# EAGLE board Line sensors gerber (EAGLE 9.4.1)
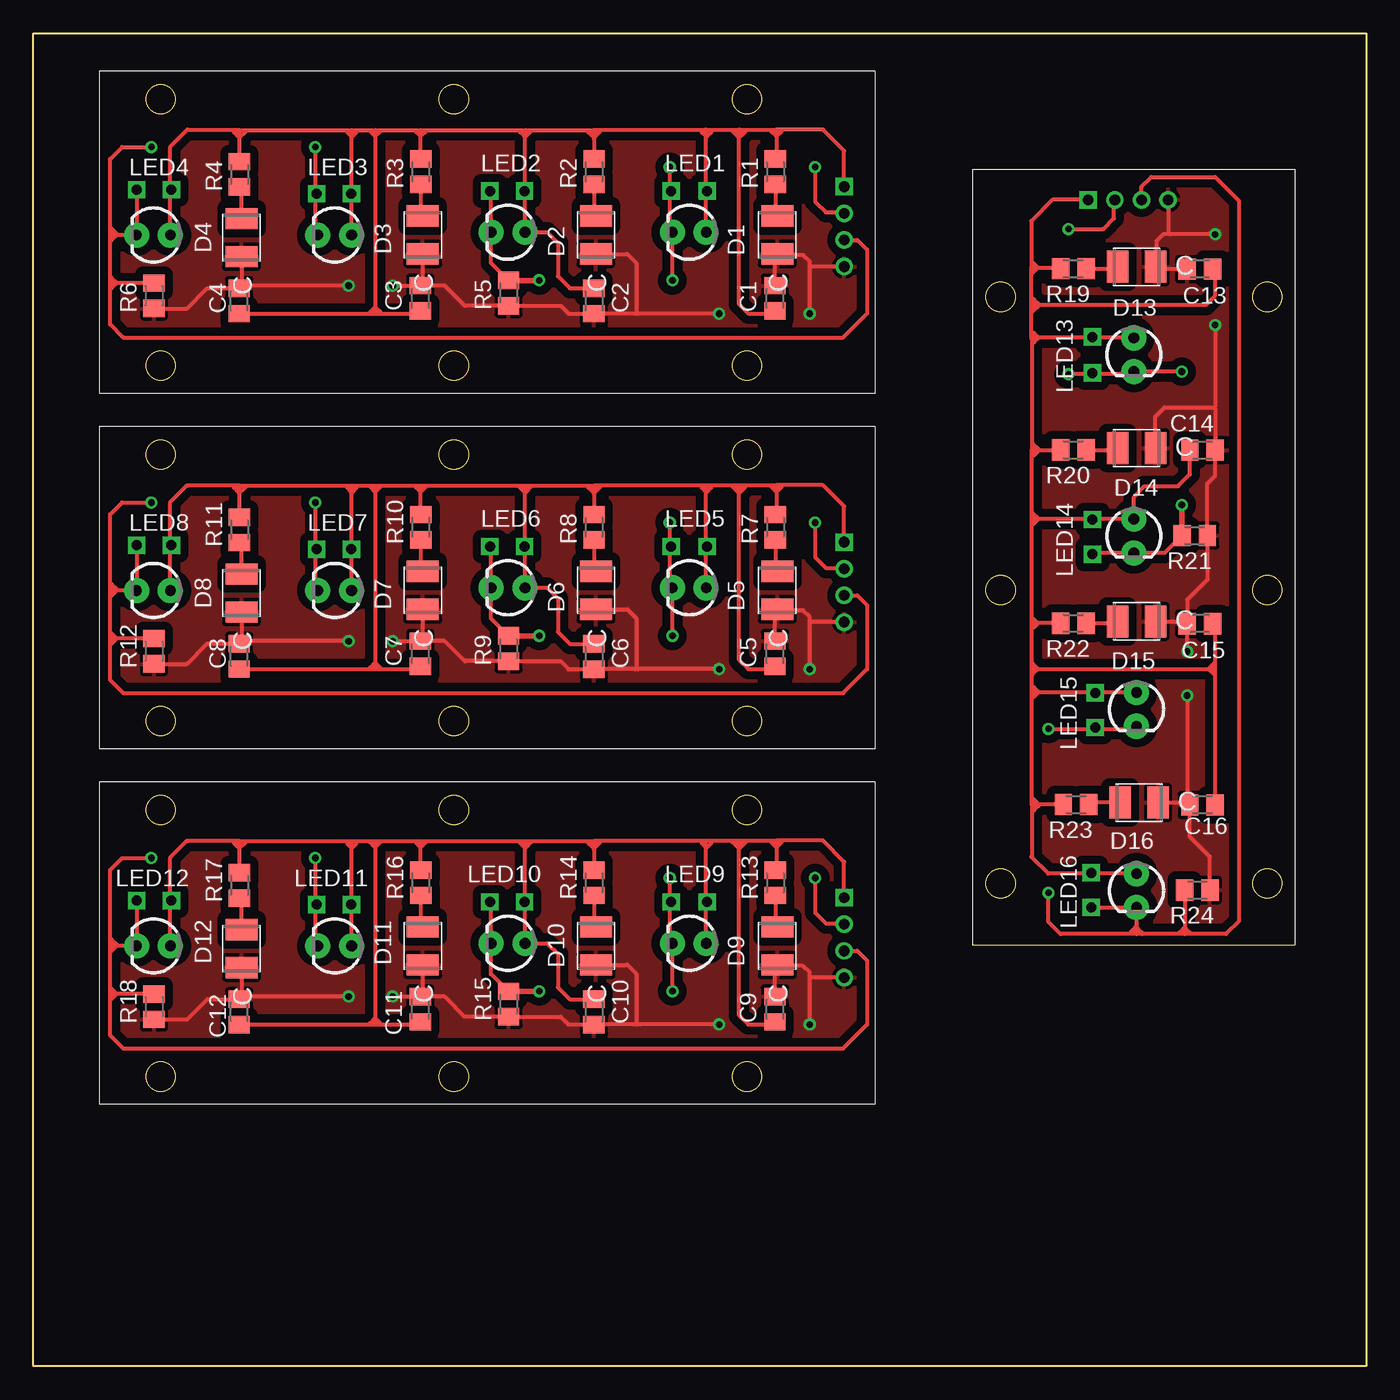
[diagram p0: board, top side]
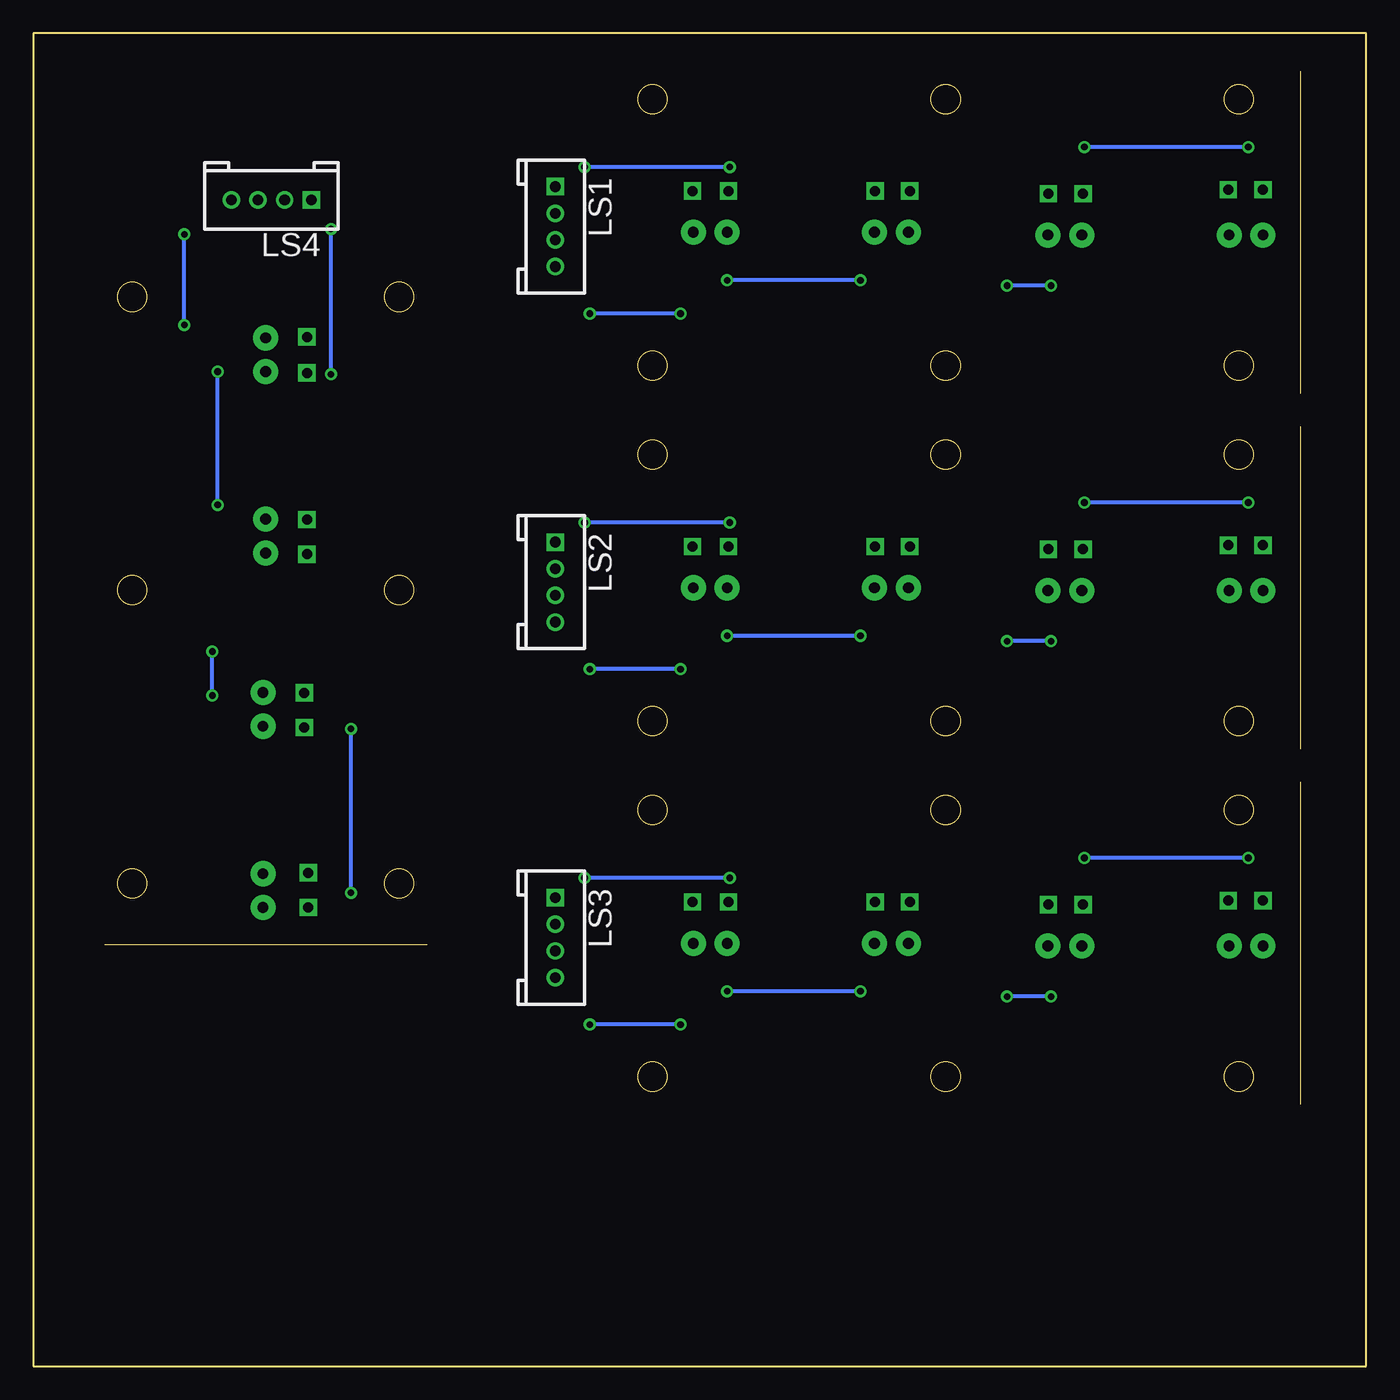
[diagram p1: board, bottom side, seen from below]

Size 100 x 100 mm. Coordinates in mm from the lower left corner, seen from the top.
Outline: 4.95,97.17 4.95,72.98
Outline: 4.95,70.5 4.95,46.31
Outline: 4.95,43.83 4.95,19.64
Outline: 70.47,31.62 94.66,31.62
Outline: 0,0 0,100 100,100 100,0 0,0
Outline: circle at 9.55,75.07 radius 1.1
Outline: circle at 53.55,95.07 radius 1.1
Outline: circle at 31.55,95.07 radius 1.1
Outline: circle at 9.55,95.07 radius 1.1
Outline: circle at 53.55,75.07 radius 1.1
Outline: circle at 31.55,75.07 radius 1.1
Outline: circle at 9.55,75.07 radius 1.1
Outline: circle at 9.55,95.07 radius 1.1
Outline: circle at 9.55,75.07 radius 1.1
Outline: circle at 53.55,95.07 radius 1.1
Outline: circle at 31.55,95.07 radius 1.1
Outline: circle at 9.55,95.07 radius 1.1
Outline: circle at 53.55,75.07 radius 1.1
Outline: circle at 31.55,75.07 radius 1.1
Outline: circle at 9.55,48.4 radius 1.1
Outline: circle at 53.55,68.4 radius 1.1
Outline: circle at 31.55,68.4 radius 1.1
Outline: circle at 9.55,68.4 radius 1.1
Outline: circle at 53.55,48.4 radius 1.1
Outline: circle at 31.55,48.4 radius 1.1
Copper layers (1*16): Top 0.035mm / dielectric 1.5mm / Bottom 0.035mm
Design rules "default": minimum track width 6mil, minimum drill 0.35mm, track to track 6mil, track to pad 6mil, pad to pad 6mil, via to via 6mil, smd to smd 6mil, copper to edge 40mil, drill to drill 6mil, minimum pad ring 10mil, minimum via ring 8mil, stop-mask expansion 4mil, vias tented up to drill 0mil, thermal gap 10mil

## Footprints (pad centres in the part's own frame; a part is rotated, then mirrored left to right if it is on the bottom)
M0805 = smd 1.3 x 1.6: 1 -0.95,0; 2 0.95,0
3528-2PIN = smd 1.6 x 2.4: 1 -1.425,0; 2 1.425,0
LED3MM = drill 0.813 pad 1.88: A -1.27,0; K 1.27,0
4P-2.0 = drill 0.8 pad 1.27 square: 1 -3,0 | drill 0.8 pad 1.27: 2 -1,0; 3 1,0; 4 3,0

## Placement (x,y rotation side)
C1  100n  [M0805]  55.64,80.12 270 top
C2  100n  [M0805]  42.06,79.92 90 top
C3  100n  [M0805]  29.04,80.12 270 top
C4  100n  [M0805]  15.44,79.92 270 top
C5  100n  [M0805]  55.64,53.45 270 top
C6  100n  [M0805]  42.06,53.25 90 top
C7  100n  [M0805]  29.04,53.45 270 top
C8  100n  [M0805]  15.44,53.25 270 top
C9  100n  [M0805]  55.64,26.78 270 top
C10  100n  [M0805]  42.06,26.58 90 top
C11  100n  [M0805]  29.04,26.78 270 top
C12  100n  [M0805]  15.44,26.58 270 top
C13  100n  [M0805]  87.52,82.31 0 top
C14  100n  [M0805]  87.72,68.73 180 top
C15  100n  [M0805]  87.52,55.71 0 top
C16  100n  [M0805]  87.72,42.11 0 top
D1  [3528-2PIN]  55.82,84.87 90 top
D2  [3528-2PIN]  42.22,84.87 90 top
D3  [3528-2PIN]  29.22,84.87 90 top
D4  [3528-2PIN]  15.62,84.67 90 top
D5  [3528-2PIN]  55.82,58.2 90 top
D6  [3528-2PIN]  42.22,58.2 90 top
D7  [3528-2PIN]  29.22,58.2 90 top
D8  [3528-2PIN]  15.62,58 90 top
D9  [3528-2PIN]  55.82,31.53 90 top
D10  [3528-2PIN]  42.22,31.53 90 top
D11  [3528-2PIN]  29.22,31.53 90 top
D12  [3528-2PIN]  15.62,31.33 90 top
D13  [3528-2PIN]  82.77,82.49 180 top
D14  [3528-2PIN]  82.77,68.89 180 top
D15  [3528-2PIN]  82.77,55.89 180 top
D16  [3528-2PIN]  82.97,42.29 180 top
LED1  [LED3MM]  49.21,85.07 180 top
LED2  [LED3MM]  35.61,85.07 180 top
LED3  [LED3MM]  22.61,84.87 180 top
LED4  [LED3MM]  9.01,84.87 180 top
LED5  [LED3MM]  49.21,58.4 180 top
LED6  [LED3MM]  35.61,58.4 180 top
LED7  [LED3MM]  22.61,58.2 180 top
LED8  [LED3MM]  9.01,58.2 180 top
LED9  [LED3MM]  49.21,31.73 180 top
LED10  [LED3MM]  35.61,31.73 180 top
LED11  [LED3MM]  22.61,31.53 180 top
LED12  [LED3MM]  9.01,31.53 180 top
LED13  [LED3MM]  82.57,75.88 270 top
LED14  [LED3MM]  82.57,62.28 270 top
LED15  [LED3MM]  82.77,49.28 270 top
LED16  [LED3MM]  82.77,35.68 270 top
LS1  [4P-2.0]  60.83,85.5 270 bottom
LS2  [4P-2.0]  60.83,58.83 270 bottom
LS3  [4P-2.0]  60.83,32.16 270 bottom
LS4  [4P-2.0]  82.14,87.5 180 bottom
R1  330  [M0805]  55.67,89.61 90 top
R2  330  [M0805]  42.07,89.61 90 top
R3  330  [M0805]  29.07,89.61 90 top
R4  330  [M0805]  15.47,89.41 90 top
R5  10k  [M0805]  35.65,80.51 90 top
R6  10k  [M0805]  9.05,80.31 90 top
R7  330  [M0805]  55.67,62.94 90 top
R8  330  [M0805]  42.07,62.94 90 top
R9  10k  [M0805]  35.65,53.84 90 top
R10  330  [M0805]  29.07,62.94 90 top
R11  330  [M0805]  15.47,62.74 90 top
R12  10k  [M0805]  9.05,53.64 90 top
R13  330  [M0805]  55.67,36.27 90 top
R14  330  [M0805]  42.07,36.27 90 top
R15  10k  [M0805]  35.65,27.17 90 top
R16  330  [M0805]  29.07,36.27 90 top
R17  330  [M0805]  15.47,36.07 90 top
R18  10k  [M0805]  9.05,26.97 90 top
R19  330  [M0805]  78.03,82.34 180 top
R20  330  [M0805]  78.03,68.74 180 top
R21  10k  [M0805]  87.13,62.32 180 top
R22  330  [M0805]  78.03,55.74 180 top
R23  330  [M0805]  78.23,42.14 180 top
R24  10k  [M0805]  87.33,35.72 180 top

## Library data of the parts
C1-C16 R1-R24 = resistor
D1-D16 = Wurth_Elektronik_Optoelectronics_rev15b; COMPANY-URL: http://www.we-online.de; CREATED-BY: Christin Otto; CREATED-DATE: APR 2013; DATASHEET-URL: http://katalog.we-online.de/en/led/WL-SMTW?m=t&sq=smtw&sp=&sp=http%3A%2F%2Fwww.we-online.de%2Fweb%2Fen%2Felectronic_components%2Fsearchpage_PBS.php%3Fsearch%3Dsmtw; MANUFACTURER: Würth Elektronik eiSos GmbH
LED1-LED16 = SparkFun
LS1-LS4 = Connector

## Nets
5V: C1.2 C2.2 C3.2 C4.2 LED1.A LED2.A LED3.A LED4.A LS1.1 R1.2 R2.2 R3.2 R4.2
5V1: C5.2 C6.2 C7.2 C8.2 LED5.A LED6.A LED7.A LED8.A LS2.1 R7.2 R8.2 R10.2 R11.2
5V2: C9.2 C10.2 C11.2 C12.2 LED9.A LED10.A LED11.A LED12.A LS3.1 R13.2 R14.2 R16.2 R17.2
5V3: C13.2 C14.2 C15.2 C16.2 LED13.A LED14.A LED15.A LED16.A LS4.1 R19.2 R20.2 R22.2 R23.2
GND: C1.1 C2.1 C3.1 C4.1 D1.1 D2.1 D3.1 D4.1 LS1.4 R5.1 R6.1
GND4: C5.1 C6.1 C7.1 C8.1 D5.1 D6.1 D7.1 D8.1 LS2.4 R9.1 R12.1
GND5: C9.1 C10.1 C11.1 C12.1 D9.1 D10.1 D11.1 D12.1 LS3.4 R15.1 R18.1
GND6: C13.1 C14.1 C15.1 C16.1 D13.1 D14.1 D15.1 D16.1 LS4.4 R21.1 R24.1
N$1: D5.2 R7.1
N$3: D1.2 R1.1
N$4: D2.2 R2.1
N$6: D6.2 R8.1
N$7: D7.2 R10.1
N$8: D8.2 R11.1
N$13: D3.2 R3.1
N$16: D4.2 R4.1
N$53: D9.2 R13.1
N$54: D10.2 R14.1
N$55: D11.2 R16.1
N$56: D12.2 R17.1
N$79: D13.2 R19.1
N$80: D14.2 R20.1
N$81: D15.2 R22.1
N$82: D16.2 R23.1
SIG1: LED1.K LED2.K LS1.2 R5.2
SIG2: LED3.K LED4.K LS1.3 R6.2
SIG3: LED5.K LED6.K LS2.2 R9.2
SIG4: LED7.K LED8.K LS2.3 R12.2
SIG5: LED9.K LED10.K LS3.2 R15.2
SIG6: LED11.K LED12.K LS3.3 R18.2
SIG7: LED13.K LED14.K LS4.2 R21.2
SIG8: LED15.K LED16.K LS4.3 R24.2

## Tracks (layer width: path | path; a pad name or v marks a point on that pad's centre or on a via)
5V
  Top 0.305: LS1.1 60.83,91.19 59.25,92.77 55.75,92.77 | 55.75,92.77 55.75,92.27 | 55.75,92.27 55.75,90.65 R1.2 | LED1.A 50.48,92.74 | 50.48,92.74 50.45,92.77 52.95,92.77 | 52.95,92.77 55.75,92.77 | 50.48,92.74 42.07,92.74 | 42.07,92.74 R2.2 | R3.2 29.07,92.74 | 29.07,92.74 36.95,92.74 | 36.95,92.74 42.07,92.74 | LED3.A 23.88,92.74 | 23.88,92.74 25.65,92.74 | 25.65,92.74 29.07,92.74 | R4.2 15.47,92.74 | 15.47,92.74 23.88,92.74 | 36.95,92.74 36.88,92.67 LED2.A 38.55,85.07 39.35,84.27 39.35,81.77 40.25,80.87 C2.2 | 52.95,92.17 52.95,79.67 53.65,78.97 55.44,78.97 C1.2 | 52.95,92.17 52.95,92.27 | 52.95,92.27 52.95,92.77 | C4.2 25.65,78.97 | 25.65,78.97 28.84,78.97 C3.2 | 25.65,92.74 25.65,92.27 | 25.65,92.27 25.65,79.47 | 25.65,79.47 25.65,78.97 | LED4.A 10.28,91.5 11.55,92.77 11.58,92.74 15.47,92.74 | 25.65,92.27 26.05,92.67 | 25.65,92.27 25.25,92.67 | 25.65,79.47 26.05,79.07 | 25.65,79.47 25.25,79.07 | 52.95,92.27 53.05,92.27 53.35,92.57 | 52.95,92.17 52.45,92.67 52.65,92.67 52.75,92.57 | 55.75,92.27 56.15,92.67 | 55.75,92.27 55.35,92.67
  Top 0.406: C2.2
5V1
  Top 0.305: LS2.1 60.83,64.52 59.25,66.1 55.75,66.1 | 55.75,66.1 55.75,65.6 | 55.75,65.6 55.75,63.98 R7.2 | LED5.A 50.48,66.07 | 50.48,66.07 50.45,66.1 52.95,66.1 | 52.95,66.1 55.75,66.1 | 50.48,66.07 42.07,66.07 | 42.07,66.07 R8.2 | R10.2 29.07,66.07 | 29.07,66.07 36.95,66.07 | 36.95,66.07 42.07,66.07 | LED7.A 23.88,66.07 | 23.88,66.07 25.65,66.07 | 25.65,66.07 29.07,66.07 | R11.2 15.47,66.07 | 15.47,66.07 23.88,66.07 | 36.95,66.07 36.88,66 LED6.A 38.55,58.4 39.35,57.6 39.35,55.1 40.25,54.2 C6.2 | 52.95,65.5 52.95,53 53.65,52.3 55.44,52.3 C5.2 | 52.95,65.5 52.95,65.6 | 52.95,65.6 52.95,66.1 | C8.2 25.65,52.3 | 25.65,52.3 28.84,52.3 C7.2 | 25.65,66.07 25.65,65.6 | 25.65,65.6 25.65,52.8 | 25.65,52.8 25.65,52.3 | LED8.A 10.28,64.83 11.55,66.1 11.58,66.07 15.47,66.07 | 25.65,65.6 26.05,66 | 25.65,65.6 25.25,66 | 25.65,52.8 26.05,52.4 | 25.65,52.8 25.25,52.4 | 52.95,65.6 53.05,65.6 53.35,65.9 | 52.95,65.5 52.45,66 52.65,66 52.75,65.9 | 55.75,65.6 56.15,66 | 55.75,65.6 55.35,66
  Top 0.406: C6.2
5V2
  Top 0.305: LS3.1 60.83,37.85 59.25,39.43 55.75,39.43 | 55.75,39.43 55.75,38.93 | 55.75,38.93 55.75,37.31 R13.2 | LED9.A 50.48,39.4 | 50.48,39.4 50.45,39.43 52.95,39.43 | 52.95,39.43 55.75,39.43 | 50.48,39.4 42.07,39.4 | 42.07,39.4 R14.2 | R16.2 29.07,39.4 | 29.07,39.4 36.95,39.4 | 36.95,39.4 42.07,39.4 | LED11.A 23.88,39.4 | 23.88,39.4 25.65,39.4 | 25.65,39.4 29.07,39.4 | R17.2 15.47,39.4 | 15.47,39.4 23.88,39.4 | 36.95,39.4 36.88,39.33 LED10.A 38.55,31.73 39.35,30.93 39.35,28.43 40.25,27.53 C10.2 | 52.95,38.83 52.95,26.33 53.65,25.63 55.44,25.63 C9.2 | 52.95,38.83 52.95,38.93 | 52.95,38.93 52.95,39.43 | C12.2 25.65,25.63 | 25.65,25.63 28.84,25.63 C11.2 | 25.65,39.4 25.65,38.93 | 25.65,38.93 25.65,26.13 | 25.65,26.13 25.65,25.63 | LED12.A 10.28,38.16 11.55,39.43 11.58,39.4 15.47,39.4 | 25.65,38.93 26.05,39.33 | 25.65,38.93 25.25,39.33 | 25.65,26.13 26.05,25.73 | 25.65,26.13 25.25,25.73 | 52.95,38.93 53.05,38.93 53.35,39.23 | 52.95,38.83 52.45,39.33 52.65,39.33 52.75,39.23 | 55.75,38.93 56.15,39.33 | 55.75,38.93 55.35,39.33
  Top 0.406: C10.2
5V3
  Top 0.305: LS4.1 76.45,87.5 74.87,85.92 74.87,82.42 | 74.87,82.42 75.37,82.42 | 75.37,82.42 76.99,82.42 R19.2 | LED13.A 74.9,77.15 | 74.9,77.15 74.87,77.12 74.87,79.62 | 74.87,79.62 74.87,82.42 | 74.9,77.15 74.9,68.74 | 74.9,68.74 R20.2 | R22.2 74.9,55.74 | 74.9,55.74 74.9,63.62 | 74.9,63.62 74.9,68.74 | LED15.A 74.9,50.55 | 74.9,50.55 74.9,52.32 | 74.9,52.32 74.9,55.74 | R23.2 74.9,42.14 | 74.9,42.14 74.9,50.55 | 74.9,63.62 74.97,63.55 LED14.A 82.57,65.22 83.37,66.02 85.87,66.02 86.77,66.92 C14.2 | 75.47,79.62 87.97,79.62 88.67,80.32 88.67,82.11 C13.2 | 75.47,79.62 75.37,79.62 | 75.37,79.62 74.87,79.62 | C16.2 88.67,52.32 | 88.67,52.32 88.67,55.51 C15.2 | 74.9,52.32 75.37,52.32 | 75.37,52.32 88.17,52.32 | 88.17,52.32 88.67,52.32 | LED16.A 76.14,36.95 74.87,38.22 74.9,38.25 74.9,42.14 | 75.37,52.32 74.97,52.72 | 75.37,52.32 74.97,51.92 | 88.17,52.32 88.57,52.72 | 88.17,52.32 88.57,51.92 | 75.37,79.62 75.37,79.72 75.07,80.02 | 75.47,79.62 74.97,79.12 74.97,79.32 75.07,79.42 | 75.37,82.42 74.97,82.82 | 75.37,82.42 74.97,82.02
  Top 0.406: C14.2
GND  (via drill 0.5)
  Top 0.305: D3.1 29.22,81.25 C3.1 | C1.1 55.64,83.27 D1.1 | D4.1 15.62,81.05 C4.1 13.05,80.87 11.54,79.36 R6.1 | 55.84,83.47 D1.1 | C3.1 30.85,81.07 32.36,79.56 R5.1 39.56,79.56 40.15,78.97 C2.1 45.15,78.97 45.25,79.07 | D2.1 44.57,83.45 45.25,82.77 45.25,79.07 | v23.65,81.07 15.64,81.07 | v26.95,81.07 C3.1 | v58.25,78.97 58.25,82.37 | 58.25,82.37 58.25,82.87 57.75,83.37 55.9,83.37 D1.1 | LS1.4 58.38,82.5 58.25,82.37 | v51.45,78.97 45.35,78.97 45.25,79.07
  Top 0.406: v26.95,81.07 | 15.64,81.07 C4.1 | 41.96,78.87 C2.1
  Bottom 0.305: v23.65,81.07 v26.95,81.07 | v51.45,78.97 v58.25,78.97
  pour Top (isolate 0.61): 3.75,97.8 64.41,97.71 64.41,72.14 3.75,72.23
GND4  (via drill 0.5)
  Top 0.305: D7.1 29.22,54.58 C7.1 | C5.1 55.64,56.6 D5.1 | D8.1 15.62,54.38 C8.1 13.05,54.2 11.54,52.69 R12.1 | 55.84,56.8 D5.1 | C7.1 30.85,54.4 32.36,52.89 R9.1 39.56,52.89 40.15,52.3 C6.1 45.15,52.3 45.25,52.4 | D6.1 44.57,56.78 45.25,56.1 45.25,52.4 | v23.65,54.4 15.64,54.4 | v26.95,54.4 C7.1 | v58.25,52.3 58.25,55.7 | 58.25,55.7 58.25,56.2 57.75,56.7 55.9,56.7 D5.1 | LS2.4 58.38,55.83 58.25,55.7 | v51.45,52.3 45.35,52.3 45.25,52.4
  Top 0.406: v26.95,54.4 | 15.64,54.4 C8.1 | 41.96,52.2 C6.1
  Bottom 0.305: v23.65,54.4 v26.95,54.4 | v51.45,52.3 v58.25,52.3
  pour Top (isolate 0.61): 3.75,71.13 64.41,71.04 64.41,45.47 3.75,45.56
GND5  (via drill 0.5)
  Top 0.305: D11.1 29.22,27.91 C11.1 | C9.1 55.64,29.93 D9.1 | D12.1 15.62,27.71 C12.1 13.05,27.53 11.54,26.02 R18.1 | 55.84,30.13 D9.1 | C11.1 30.85,27.73 32.36,26.22 R15.1 39.56,26.22 40.15,25.63 C10.1 45.15,25.63 45.25,25.73 | D10.1 44.57,30.11 45.25,29.43 45.25,25.73 | v23.65,27.73 15.64,27.73 | v26.95,27.73 C11.1 | v58.25,25.63 58.25,29.03 | 58.25,29.03 58.25,29.53 57.75,30.03 55.9,30.03 D9.1 | LS3.4 58.38,29.16 58.25,29.03 | v51.45,25.63 45.35,25.63 45.25,25.73
  Top 0.406: v26.95,27.73 | 15.64,27.73 C12.1 | 41.96,25.53 C10.1
  Bottom 0.305: v23.65,27.73 v26.95,27.73 | v51.45,25.63 v58.25,25.63
  pour Top (isolate 0.61): 3.75,44.46 64.41,44.37 64.41,18.8 3.75,18.89
GND6  (via drill 0.5)
  Top 0.305: D15.1 86.39,55.89 C15.1 | C13.1 84.37,82.31 D13.1 | D16.1 86.59,42.29 C16.1 86.77,39.72 88.28,38.21 R24.1 | 84.17,82.51 D13.1 | C15.1 86.57,57.52 88.08,59.03 R21.1 88.08,66.23 88.67,66.82 C14.1 88.67,71.82 88.57,71.92 | D14.1 84.19,71.24 84.87,71.92 88.57,71.92 | v86.57,50.32 86.57,42.31 | v86.57,53.62 C15.1 | v88.67,84.92 85.27,84.92 | 85.27,84.92 84.77,84.92 84.27,84.42 84.27,82.56 D13.1 | LS4.4 85.14,85.05 85.27,84.92 | v88.67,78.12 88.67,72.02 88.57,71.92
  Top 0.406: v86.57,53.62 | 86.57,42.31 C16.1 | 88.77,68.63 C14.1
  Bottom 0.305: v86.57,50.32 v86.57,53.62 | v88.67,78.12 v88.67,84.92
  pour Top (isolate 0.61): 69.84,30.42 69.93,91.08 95.5,91.08 95.41,30.42
N$1
  Top 0.305: R7.1 55.67,59.78 D5.2
N$2  (via drill 0.75 pad 1.3)
  Top 0.305: v7.75,88.27 7.75,84.87
N$3
  Top 0.305: R1.1 55.67,86.45 D1.2
N$4
  Top 0.305: R2.1 42.07,86.45 D2.2
N$5  (via drill 0.75 pad 1.3)
  other vias: 10.35,88.27
N$6
  Top 0.305: R8.1 42.07,59.78 D6.2
N$7
  Top 0.305: R10.1 29.07,59.78 D7.2
N$8
  Top 0.305: D8.2 15.62,61.65 R11.1
N$9  (via drill 0.75 pad 1.3)
  Top 0.305: v7.75,61.6 7.75,58.2
N$10  (via drill 0.75 pad 1.3)
  other vias: 10.35,61.6
N$11  (via drill 0.75 pad 1.3)
  other vias: 21.25,61.3
N$12  (via drill 0.75 pad 1.3)
  other vias: 23.85,61.3
N$13
  Top 0.305: R3.1 29.07,86.45 D3.2
N$14  (via drill 0.75 pad 1.3)
  other vias: 21.25,87.97
N$15  (via drill 0.75 pad 1.3)
  other vias: 36.85,61.5
N$16
  Top 0.305: D4.2 15.62,88.32 R4.1
N$17  (via drill 0.75 pad 1.3)
  other vias: 34.25,61.5
N$18  (via drill 0.75 pad 1.3)
  other vias: 50.55,61.5
N$19  (via drill 0.75 pad 1.3)
  other vias: 23.85,87.97
N$20  (via drill 0.75 pad 1.3)
  other vias: 36.85,88.17
N$21  (via drill 0.75 pad 1.3)
  other vias: 34.25,88.17
N$22  (via drill 0.75 pad 1.3)
  other vias: 50.55,88.17
N$23  (via drill 0.75 pad 1.3)
  other vias: 47.85,88.17
N$24  (via drill 0.75 pad 1.3)
  other vias: 47.85,61.5
N$25
  Top 0.305: 29.45,66 29.05,65.6 28.75,65.9
N$26
  Top 0.305: 37.35,66 36.95,65.6 36.85,65.6 36.45,66
N$27
  Top 0.305: 29.45,92.67 29.05,92.27 28.75,92.57
N$28
  Top 0.305: 37.35,92.67 36.95,92.27 36.85,92.27 36.45,92.67
N$29
  Top 0.305: 23.95,92.27 24.25,92.57
N$30
  Top 0.305: 23.85,92.27 23.55,92.57
N$31
  Top 0.305: 15.95,92.67 15.45,92.17 15.05,92.57 15.35,92.57
N$32
  Top 0.305: 5.85,85.37 6.25,84.97 6.05,84.97 5.95,85.07
N$33
  Top 0.305: 5.85,80.87 6.15,81.17
N$34
  Top 0.305: 5.85,81.67 6.15,81.37
N$35
  Top 0.305: 42.05,92.07 42.05,92.17 | 42.05,92.17 42.55,92.67 | 42.05,92.17 41.65,92.57 42.05,92.57
N$36
  Top 0.305: 42.15,92.57 42.25,92.57
N$37
  Top 0.305: 50.55,92.27 50.85,92.57
N$38
  Top 0.305: 50.45,92.27 50.15,92.57
N$39
  Top 0.305: 53.15,92.57 53.15,92.67
N$40
  Top 0.305: 53.05,92.37 53.15,92.37 53.45,92.67
N$41
  Top 0.305: 23.95,65.6 24.25,65.9
N$42
  Top 0.305: 23.85,65.6 23.55,65.9
N$43
  Top 0.305: 15.95,66 15.45,65.5 15.05,65.9 15.35,65.9
N$44
  Top 0.305: 5.85,58.7 6.25,58.3 6.05,58.3 5.95,58.4
N$45
  Top 0.305: 5.85,54.2 6.15,54.5
N$46
  Top 0.305: 5.85,55 6.15,54.7
N$47
  Top 0.305: 42.05,65.4 42.05,65.5 | 42.05,65.5 42.55,66 | 42.05,65.5 41.65,65.9 42.05,65.9
N$48
  Top 0.305: 42.15,65.9 42.25,65.9
N$49
  Top 0.305: 50.55,65.6 50.85,65.9
N$50
  Top 0.305: 50.45,65.6 50.15,65.9
N$51
  Top 0.305: 53.15,65.9 53.15,66
N$52
  Top 0.305: 53.05,65.7 53.15,65.7 53.45,66
N$53
  Top 0.305: R13.1 55.67,33.11 D9.2
N$54
  Top 0.305: R14.1 42.07,33.11 D10.2
N$55
  Top 0.305: R16.1 29.07,33.11 D11.2
N$56
  Top 0.305: D12.2 15.62,34.98 R17.1
N$57  (via drill 0.75 pad 1.3)
  Top 0.305: v7.75,34.93 7.75,31.53
N$58  (via drill 0.75 pad 1.3)
  other vias: 10.35,34.93
N$59  (via drill 0.75 pad 1.3)
  other vias: 21.25,34.63
N$60  (via drill 0.75 pad 1.3)
  other vias: 23.85,34.63
N$61  (via drill 0.75 pad 1.3)
  other vias: 36.85,34.83
N$62  (via drill 0.75 pad 1.3)
  other vias: 34.25,34.83
N$63  (via drill 0.75 pad 1.3)
  other vias: 50.55,34.83
N$64  (via drill 0.75 pad 1.3)
  other vias: 47.85,34.83
N$65
  Top 0.305: 29.45,39.33 29.05,38.93 28.75,39.23
N$66
  Top 0.305: 37.35,39.33 36.95,38.93 36.85,38.93 36.45,39.33
N$67
  Top 0.305: 23.95,38.93 24.25,39.23
N$68
  Top 0.305: 23.85,38.93 23.55,39.23
N$69
  Top 0.305: 15.95,39.33 15.45,38.83 15.05,39.23 15.35,39.23
N$70
  Top 0.305: 5.85,32.03 6.25,31.63 6.05,31.63 5.95,31.73
N$71
  Top 0.305: 5.85,27.53 6.15,27.83
N$72
  Top 0.305: 5.85,28.33 6.15,28.03
N$73
  Top 0.305: 42.05,38.73 42.05,38.83 | 42.05,38.83 42.55,39.33 | 42.05,38.83 41.65,39.23 42.05,39.23
N$74
  Top 0.305: 42.15,39.23 42.25,39.23
N$75
  Top 0.305: 50.55,38.93 50.85,39.23
N$76
  Top 0.305: 50.45,38.93 50.15,39.23
N$77
  Top 0.305: 53.15,39.23 53.15,39.33
N$78
  Top 0.305: 53.05,39.03 53.15,39.03 53.45,39.33
N$79
  Top 0.305: R19.1 81.19,82.34 D13.2
N$80
  Top 0.305: R20.1 81.19,68.74 D14.2
N$81
  Top 0.305: R22.1 81.19,55.74 D15.2
N$82
  Top 0.305: D16.2 79.32,42.29 R23.1
N$83  (via drill 0.75 pad 1.3)
  Top 0.305: v79.37,34.42 82.77,34.42
N$84  (via drill 0.75 pad 1.3)
  other vias: 79.37,37.02
N$85  (via drill 0.75 pad 1.3)
  other vias: 79.67,47.92
N$86  (via drill 0.75 pad 1.3)
  other vias: 79.67,50.52
N$87  (via drill 0.75 pad 1.3)
  other vias: 79.47,63.52
N$88  (via drill 0.75 pad 1.3)
  other vias: 79.47,60.92
N$89  (via drill 0.75 pad 1.3)
  other vias: 79.47,77.22
N$90  (via drill 0.75 pad 1.3)
  other vias: 79.47,74.52
N$91
  Top 0.305: 74.97,56.12 75.37,55.72 75.07,55.42
N$92
  Top 0.305: 74.97,64.02 75.37,63.62 75.37,63.52 74.97,63.12
N$93
  Top 0.305: 75.37,50.62 75.07,50.92
N$94
  Top 0.305: 75.37,50.52 75.07,50.22
N$95
  Top 0.305: 74.97,42.62 75.47,42.12 75.07,41.72 75.07,42.02
N$96
  Top 0.305: 82.27,32.52 82.67,32.92 82.67,32.72 82.57,32.62
N$97
  Top 0.305: 86.77,32.52 86.47,32.82
N$98
  Top 0.305: 85.97,32.52 86.27,32.82
N$99
  Top 0.305: 75.57,68.72 75.47,68.72 | 75.47,68.72 74.97,69.22 | 75.47,68.72 75.07,68.32 75.07,68.72
N$100
  Top 0.305: 75.07,68.82 75.07,68.92
N$101
  Top 0.305: 75.37,77.22 75.07,77.52
N$102
  Top 0.305: 75.37,77.12 75.07,76.82
N$103
  Top 0.305: 75.07,79.82 74.97,79.82
N$104
  Top 0.305: 75.27,79.72 75.27,79.82 74.97,80.12
SIG1  (via drill 0.5)
  Top 0.305: R5.2 34.34,82.77 LED2.K 34.34,88.26 34.35,88.27 | v47.95,81.47 LED1.K | 47.75,85.26 v47.75,89.97 | v58.65,89.97 58.65,87.37 59.45,86.57 60.76,86.57 LS1.2
  Top 0.406: R5.2 37.94,81.46 v37.95,81.47 | LED1.K 47.75,85.26
  Bottom 0.305: v37.95,81.47 v47.95,81.47 | v47.75,89.97 v58.65,89.97
SIG2  (via drill 0.5)
  Top 0.305: LS1.3 61.82,84.5 62.55,83.77 62.55,78.97 60.75,77.17 6.75,77.17 5.75,78.17 5.75,81.27 | 5.75,81.27 5.75,84.47 | 5.75,84.47 5.75,84.87 | 5.75,84.87 5.75,90.57 6.65,91.47 v8.85,91.47 | v21.15,91.47 21.15,85.06 LED3.K | R6.2 5.76,81.26 5.75,81.27 | LED4.K 5.75,84.87 | 5.75,84.47 5.85,84.47 6.15,84.77
  Bottom 0.305: v8.85,91.47 v21.15,91.47
SIG3  (via drill 0.5)
  Top 0.305: R9.2 34.34,56.1 LED6.K 34.34,61.59 34.35,61.6 | v47.95,54.8 LED5.K | 47.75,58.59 v47.75,63.3 | v58.65,63.3 58.65,60.7 59.45,59.9 60.76,59.9 LS2.2
  Top 0.406: R9.2 37.94,54.79 v37.95,54.8 | LED5.K 47.75,58.59
  Bottom 0.305: v37.95,54.8 v47.95,54.8 | v47.75,63.3 v58.65,63.3
SIG4  (via drill 0.5)
  Top 0.305: LS2.3 61.82,57.83 62.55,57.1 62.55,52.3 60.75,50.5 6.75,50.5 5.75,51.5 5.75,54.6 | 5.75,54.6 5.75,57.8 | 5.75,57.8 5.75,58.2 | 5.75,58.2 5.75,63.9 6.65,64.8 v8.85,64.8 | v21.15,64.8 21.15,58.39 LED7.K | R12.2 5.76,54.59 5.75,54.6 | LED8.K 5.75,58.2 | 5.75,57.8 5.85,57.8 6.15,58.1
  Bottom 0.305: v8.85,64.8 v21.15,64.8
SIG5  (via drill 0.5)
  Top 0.305: R15.2 34.34,29.43 LED10.K 34.34,34.92 34.35,34.93 | v47.95,28.13 LED9.K | 47.75,31.92 v47.75,36.63 | v58.65,36.63 58.65,34.03 59.45,33.23 60.76,33.23 LS3.2
  Top 0.406: R15.2 37.94,28.12 v37.95,28.13 | LED9.K 47.75,31.92
  Bottom 0.305: v37.95,28.13 v47.95,28.13 | v47.75,36.63 v58.65,36.63
SIG6  (via drill 0.5)
  Top 0.305: LS3.3 61.82,31.16 62.55,30.43 62.55,25.63 60.75,23.83 6.75,23.83 5.75,24.83 5.75,27.93 | 5.75,27.93 5.75,31.13 | 5.75,31.13 5.75,31.53 | 5.75,31.53 5.75,37.23 6.65,38.13 v8.85,38.13 | v21.15,38.13 21.15,31.72 LED11.K | R18.2 5.76,27.92 5.75,27.93 | LED12.K 5.75,31.53 | 5.75,31.13 5.85,31.13 6.15,31.43
  Bottom 0.305: v8.85,38.13 v21.15,38.13
SIG7  (via drill 0.5)
  Top 0.305: R21.2 84.87,61.01 LED14.K 79.38,61.01 79.37,61.02 | v86.17,74.62 LED13.K | 82.38,74.42 v77.67,74.42 | v77.67,85.32 80.27,85.32 81.07,86.12 81.07,87.43 LS4.2
  Top 0.406: R21.2 86.18,64.61 v86.17,64.62 | LED13.K 82.38,74.42
  Bottom 0.305: v86.17,64.62 v86.17,74.62 | v77.67,74.42 v77.67,85.32
SIG8  (via drill 0.5)
  Top 0.305: LS4.3 83.14,88.49 83.87,89.22 88.67,89.22 90.47,87.42 90.47,33.42 89.47,32.42 86.37,32.42 | 86.37,32.42 83.17,32.42 | 83.17,32.42 82.77,32.42 | 82.77,32.42 77.07,32.42 76.17,33.32 v76.17,35.52 | v76.17,47.82 82.58,47.82 LED15.K | R24.2 86.38,32.43 86.37,32.42 | LED16.K 82.77,32.42 | 83.17,32.42 83.17,32.52 82.87,32.82
  Bottom 0.305: v76.17,35.52 v76.17,47.82